# Altium PCB 3_iip_quad_uart.PcbDoc (part 1 of 2)
Units mm, origin at the board's own origin, x right, y up, seen from the top; angles counter-clockwise.
Board outline 82.5 x 28 mm, 2 copper layers (Top Layer, Bottom Layer), stack 1.571 mm thick; 55 components, 29 nets, 180 pads, 29 vias.
Unrouted connection lines stored in the file: 1.
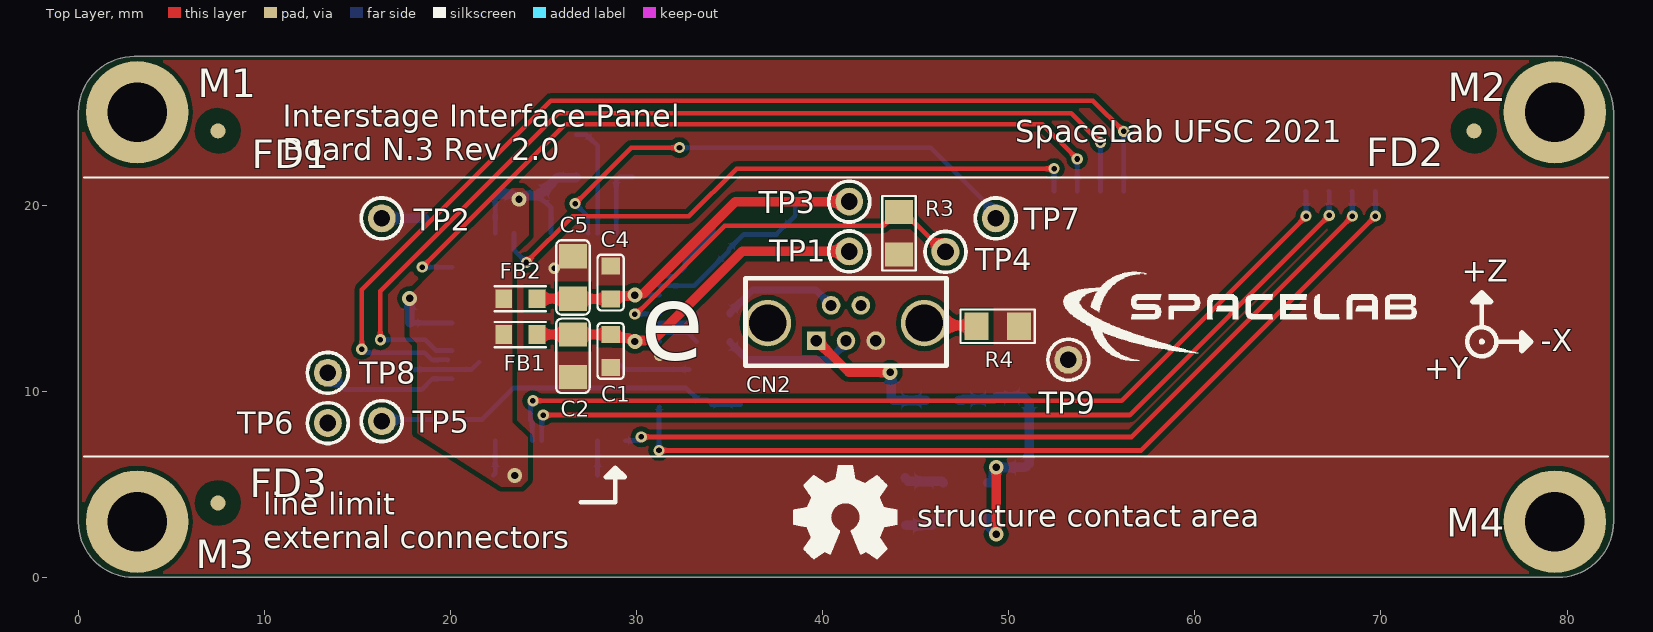
[diagram p0: Top Layer view]
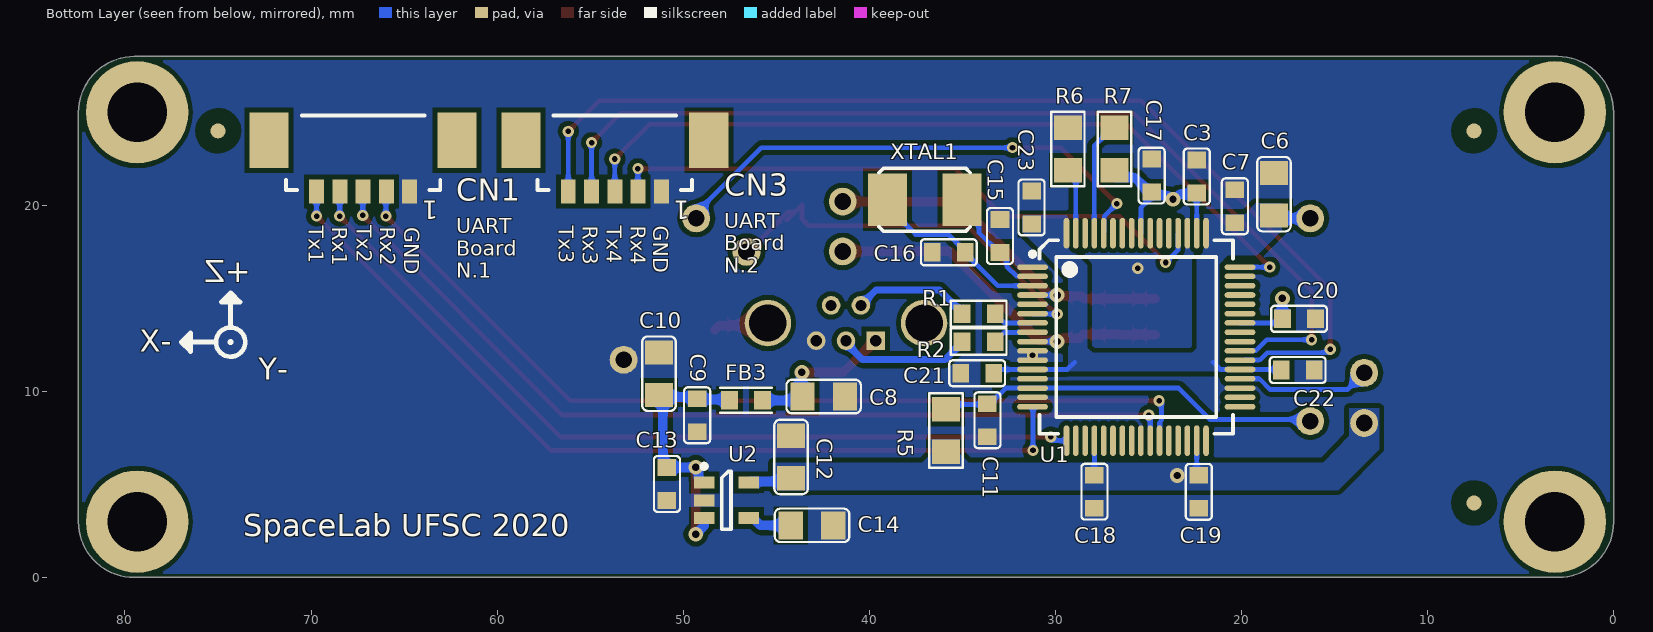
[diagram p1: Bottom Layer view, seen from below]
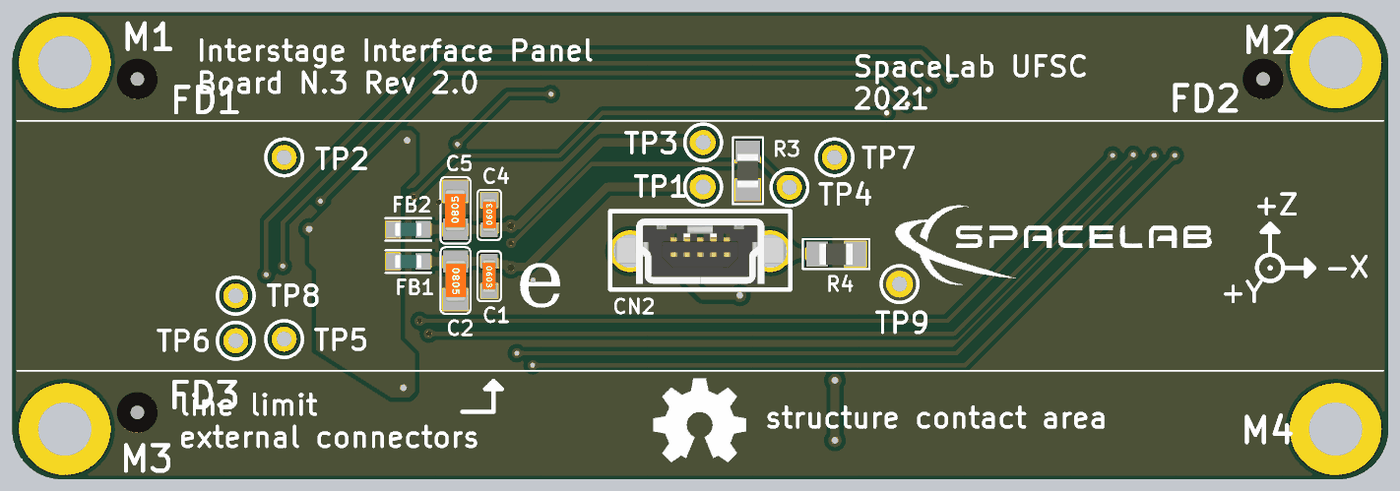
[diagram p2: 3D render of the assembled board from above, using the file's embedded part models]
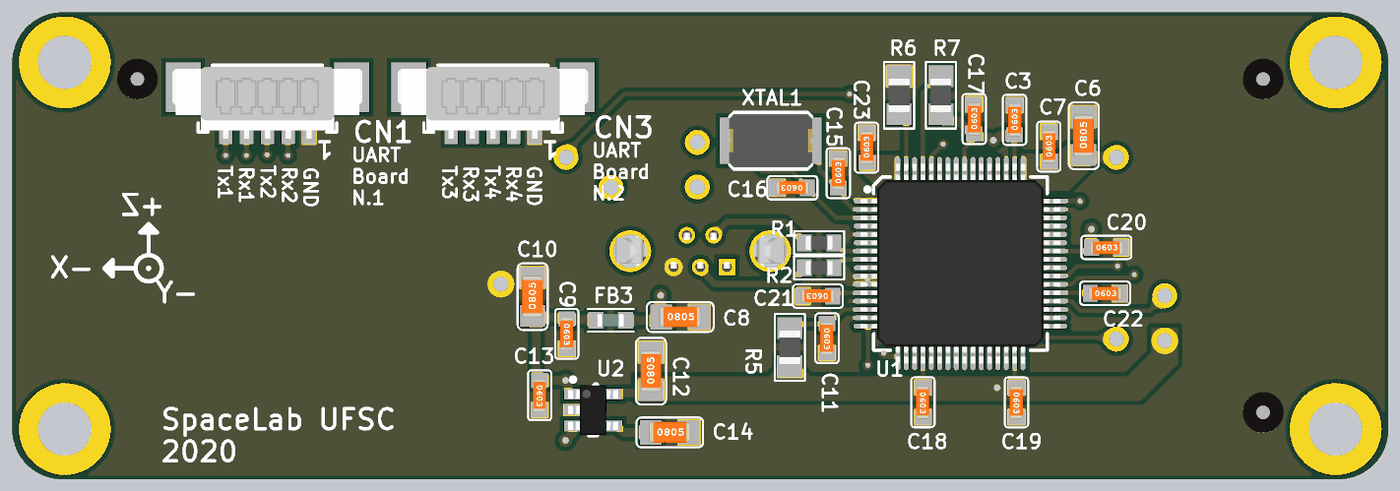
[diagram p3: 3D render of the assembled board from below, using the file's embedded part models]

## Layer stack, top to bottom
Top Solder: solder mask 0.0102, Solder Resist, Dk 3.8
Top Layer: signal copper 0.0356
Dielectric 1: dielectric 1.5, FR-4, Dk 4.5
Bottom Layer: signal copper 0.0356
Bottom Solder: solder mask 0.0102, Solder Resist, Dk 3.8

## Board outline
0,2.962 0,25.005 cw(c2.995,25.005) 2.995,28 79.498,28 cw(c79.498,24.998) 82.5,24.998 82.5,2.985 cw(c79.515,2.985) 79.515,0 2.962,0 cw(c2.962,2.962)

## Design rules (kind name [scope] priority, off if disabled: settings)
BoardOutlineClearance BoardOutlineClearance_JLCPCB [All] p1: gap=0.2 ignorepadtopadclearanceinfootprint=FALSE
BoardOutlineClearance [All] p2: gap=0.254 ignorepadtopadclearanceinfootprint=FALSE except(0: Arc-SplitContinuation Track-SplitContinuation SMDPad-SplitContinuation THPad-SplitContinuation Via-SplitContinuation Fill-SplitContinuation Poly-SplitContinuation Region-SplitContinuation Text-SplitContinuation)
Clearance Clearance_JLCPCB_capabilities [All] p1: gap=0.254 ignorepadtopadclearanceinfootprint=TRUE except(0: Track-Region SMDPad-Region SMDPad-Hole THPad-Region THPad-Hole Via-Hole Fill-Hole Poly-Hole Region-Region Region-Hole Text-Hole; 0.127: Arc-Arc Arc-Track Track-Track SMDPad-SMDPad; 0.15: SMDPad-Text THPad-Text; 0.152: SMDPad-THPad; 0.2: Arc-SMDPad Track-SMDPad; 0.33: Arc-THPad Track-THPad; 0.54: THPad-THPad) // Minimal clearances considering JLCPCB manufacturing
Clearance [All] p2: gap=0.254 ignorepadtopadclearanceinfootprint=FALSE except(0: Arc-Hole Track-Hole SMDPad-Hole THPad-Hole Via-Hole Fill-Hole Poly-Hole Region-Hole Text-Hole) // Default altium designer clearence rule
DiffPairsRouting [All] p1: maxlimit=0.254 minlimit=0.254 mostfreqgap=0.254 toplayer_minwidth=0.254 toplayer_maxwidth=0.381 toplayer_prefwidth=0.381 bottomlayer_minwidth=0.254 bottomlayer_maxwidth=0.381 bottomlayer_prefwidth=0.381 maxuncoupledlength=12.7
HoleSize HoleSize_JLCPCB_capabilities [All] p1: absolutevalues=TRUE maxlimit=6.3 minlimit=0.3 maxpercent=80.000 minpercent=20.000
HoleSize [All] p2: absolutevalues=TRUE maxlimit=2.54 minlimit=0.025 maxpercent=80.000 minpercent=20.000
HoleToHoleClearance HoleToHoleClearance_JLCPCB [All] p1: gap=0.54 allowstackedmicrovias=TRUE
HoleToHoleClearance [All] p2: gap=0.254 allowstackedmicrovias=TRUE
MinimumAnnularRing AnnularRing_JLCPCB_1oz_capabilities [All] p1: minimumring=0.13
MinimumAnnularRing [All] p2: minimumring=0.254
MinimumSolderMaskSliver MinimumSolderMaskSliver_none [All] p1: minsoldermaskwidth=0
MinimumSolderMaskSliver MinimumSolderMaskSliver_JLCPCB [All] p2: minsoldermaskwidth=0.2
MinimumSolderMaskSliver [All] p3: minsoldermaskwidth=0.254
PolygonConnect PolygonConnect_GND [InNet('GND')] p1: connectstyle=Direct reliefconductorwidth=0.254 reliefentries=4 polygonreliefangle="90 Angle" airgapwidth=0.254
PolygonConnect PolygonConnect_Power [(InNet('1.8V') OR InNet('3.3V') OR InNet('5V'))] p2: connectstyle=Direct reliefconductorwidth=0.254 reliefentries=4 polygonreliefangle="90 Angle" airgapwidth=0.254 // Power polygons for power nets (debugger and battery charger)
PolygonConnect [All] p3: connectstyle=Relief reliefconductorwidth=0.254 reliefentries=4 polygonreliefangle="90 Angle" airgapwidth=0.254
RoutingVias RoutingVias_JLCPCB_capabilities [All] p1: holewidth=0.3 width=0.6 viastyle="Through Hole" minholewidth=0.3 minwidth=0.6 maxholewidth=0.711 maxwidth=1.27
RoutingVias [All] p2: holewidth=0.711 width=1.27 viastyle="Through Hole" minholewidth=0.711 minwidth=1.27 maxholewidth=0.711 maxwidth=1.27
SilkToSolderMaskClearance SilkToSolderMaskClearance_none [IsPad] p1: minsilkscreentomaskgap=0 clearancetoexposedcopper=TRUE
SilkToSolderMaskClearance SilkToSolderMaskClearance_JLCPCB [IsPad] p2: minsilkscreentomaskgap=0.15 clearancetoexposedcopper=TRUE
SilkToSolderMaskClearance [IsPad] p3: minsilkscreentomaskgap=0.254 clearancetoexposedcopper=TRUE
SolderMaskExpansion SolderMaskExpansion_JLCPCB [All] p1: expansion=0.05
SolderMaskExpansion [All] p2: expansion=0.102
Width Width_JLCPCB_capabilities [All] p1: maxlimit=0.508 minlimit=0.127 preferedwidth=0.254 minimp=50.000000 maximp=50.000000 favimp=50.000000 // Width considering JLCPCB manufacturing
Width [All] p2: maxlimit=0.254 minlimit=0.254 preferedwidth=0.254
25 further rules are at their usual default settings.

## Classes and differential pairs
component class 0_Architecture: FD1 FD2 FD3 M1 M2 M3 M4
component class 3_iip_quad_uart: C1 C2 C3 C4 C5 C6 C7 C8 C9 C10 C11 C12 C13 C14 C15 C16 C17 C18 C19 C20 C21 C22 C23 CN1 CN2 CN3 FB1 FB2 FB3 R1 R2 R3 R4 R5 R6 R7 TP1 TP2 TP3 TP4 TP5 TP6 U1 U2 XTAL1
differential pair USB_RX: +USB_RX_P -USB_RX_N
differential pair USB_TX: +USB_TX_P -USB_TX_N

## Components (designator, comment, footprint, x,y, rotation, side; value= is the part's Value field where it differs from the comment)
C1 "0.1 uF, 0603 (1608 metric)" C0603_MD 28.6,12.175 r270 top
C2 "4.7 uF, 0802 (2012 metric)" C0805_MD 26.575,11.913 r270 top
C3 "0.1 uF, 0603 (1608 metric)" C0603_MD 22.4,21.55 r90 bottom
C4 "0.1 uF, 0603 (1608 metric)" C0603_MD 28.6,15.85 r90 top
C5 "4.7 uF, 0802 (2012 metric)" C0805_MD 26.575,16.124 r90 top
C6 "4.7 uF, 0802 (2012 metric)" C0805_MD 18.25,20.6 r90 bottom
C7 "0.1 uF, 0603 (1608 metric)" C0603_MD 20.35,19.95 r90 bottom
C8 "10000 pF, 0805 (2012 metric)" C0805_MD 42.45,9.725 r180 bottom
C9 "0.1 uF, 0603 (1608 metric)" C0603_MD 49.25,8.718 r270 bottom
C10 "4.7 uF, 0802 (2012 metric)" C0805_MD 51.3,10.95 r90 bottom
C11 "0.1 uF, 0603 (1608 metric)" C0603_MD 33.65,8.45 r270 bottom
C12 "4.7 uF, 0802 (2012 metric)" C0805_MD 44.2,6.475 r90 bottom
C13 "0.1 uF, 0603 (1608 metric)" C0603_MD 50.875,5.025 r270 bottom
C14 "10000 pF, 0805 (2012 metric)" C0805_MD 43.075,2.8 r180 bottom
C15 "12 pF, 0603 (1608 metric)" C0603_MD 32.975,18.35 r90 bottom
C16 "12 pF, 0603 (1608 metric)" C0603_MD 35.725,17.475 r0 bottom
C17 "0.1 uF, 0603 (1608 metric)" C0603_MD 24.825,21.6 r90 bottom
C18 "0.1 uF, 0603 (1608 metric)" C0603_MD 27.9,4.609 r270 bottom
C19 "0.1 uF, 0603 (1608 metric)" C0603_MD 22.289,4.605 r270 bottom
C20 "0.1 uF, 0603 (1608 metric)" C0603_MD 16.9,13.9 r180 bottom
C21 "0.1 uF, 0603 (1608 metric)" C0603_MD 34.2,10.975 r0 bottom
C22 "0.1 uF, 0603 (1608 metric)" C0603_MD 16.975,11.15 r180 bottom
C23 "0.1 uF, 0603 (1608 metric)" C0603_MD 31.275,19.886 r90 bottom
CN1 "5 pin PicoBlade" "PICO BLADE 0533980571" 67.2,22.125 r0 bottom
CN2 "Vertical mini B USB 2.0 port" "MINI USB B 180GRAUS WE" 41.25,13.675 r0 top
CN3 "5 pin PicoBlade" "PICO BLADE 0533980571" 53.675,22.125 r0 bottom
FB1 "Ferrite Bead 47 Ohms 500mA 100MHz" L0603 23.75,13.056 r0 top
FB2 "Ferrite Bead 47 Ohms 500mA 100MHz" L0603 23.75,14.981 r0 top
FB3 "Ferrite Bead 47 Ohms 500mA 100MHz" L0603 46.625,9.525 r0 bottom
FD1 "Fiducial 1.3" "FIDUCIAL 1.3MM" 7.5,24 r0 top
FD2 "Fiducial 1.3" "FIDUCIAL 1.3MM" 75,24 r0 top
FD3 "Fiducial 1.3" "FIDUCIAL 1.3MM" 7.5,4 r0 top
M1 "IB Mechanical Hole" "M3 hole (5.5mm pad)"#1 3,25 r0 top
M2 "IB Mechanical Hole" "M3 hole (5.5mm pad)"#1 3,3 r0 top
M3 "IB Mechanical Hole" "M3 hole (5.5mm pad)"#2 79.4,24.9 r0 top
M4 "IB Mechanical Hole" "M3 hole (5.5mm pad)"#3 79.4,3 r0 top
R1 "RES 10 ohms (0603)" R0603_MD 34.121,14.175 r180 bottom
R2 "RES 10 ohms (0603)" R0603_MD 34.121,12.675 r180 bottom
R3 "RES 12K ohms (0805)" R0805_MD 44.1,18.5 r90 top
R4 "DNP" R0805_MD 49.4,13.5 r0 top
R5 "10k ohms, 0805 (2012 metric)" R0805_MD 35.875,7.9 r90 bottom value=10k
R6 "10k ohms, 0805 (2012 metric)" R0805_MD 29.325,23.025 r270 bottom value=10k
R7 "10k ohms, 0805 (2012 metric)" R0805_MD 26.825,23.025 r90 bottom value=10k
TP1 "DNP" "TEST POINT PTH" 41.425,17.525 r0 top
TP2 "DNP" "TEST POINT PTH" 16.3,19.3 r0 top
TP3 "DNP" "TEST POINT PTH" 41.425,20.2 r0 top
TP4 "DNP" "TEST POINT PTH" 46.6,17.5 r0 top
TP5 "DNP" "TEST POINT PTH" 16.3,8.4 r0 top
TP6 "DNP" "TEST POINT PTH" 13.4,8.3 r0 top
TP7 "DNP" "TEST POINT PTH" 49.3,19.3 r90 top
TP8 "DNP" "TEST POINT PTH" 13.4,11 r90 top
TP9 "DNP" "TEST POINT PTH" 53.2,11.7 r90 top
U1 "FT4232HL-REEL" LQFP-64 25.65,12.929 r180 bottom
U2 "TPS79333DBVR" SOT23-5 47.675,4.147 r180 bottom
XTAL1 "12.000MHz 12pF" "TXC 7A SERIES" 37.025,20.3 r0 bottom

## Footprints (in the part's own frame and the unit in brackets; to place one, negate y for a bottom-side part, rotate by r counter-clockwise, add the part's x,y. Pads: shape width x height; smd on the part's side, far side on the other; paste and mask are expansions set on the pad)
C0603_MD [mm] "Chip Capacitor, Body 1.6x0.8mm, IPC Medium Density"
  rect 0.9x1 smd: 1(-0.889,0) 2(0.889,0)
  silkscreen extent -1.5,-0.7 1.5,0.7, body extent -1,-0.41 1,0.38, height 0.79
C0805_MD [mm] "Chip Capacitor, Body 2.0x1.3mm, IPC Medium Density"
  rect 1.3x1.5 smd: 1(-1.143,0) 2(1.143,0)
  silkscreen extent -2,-0.9 2,0.9, body extent -1.25,-0.61 1.25,0.64, height 0.79
"FIDUCIAL 1.3MM" [mil]
  round 32 smd far side: ""(0,0)
  round 32 on Bottom Solder: ""(0,0)
  round 32 smd: ""(0,0)
  Top Layer pour cut-out: -48.23,-6.89 -45.31,17.58 -30.69,37.43 -8.18,47.47 16.35,45.09 36.52,30.91 47.05,8.63 45.22,-15.95 31.5,-36.42 31.5,-36.42 8.41,-46.85 -16.81,-44.45 -37.51,-29.85 -48.23,-6.89
  Bottom Layer pour cut-out: -48.23,-6.89 -45.31,17.58 -30.69,37.43 -8.18,47.47 16.35,45.09 36.52,30.91 47.05,8.63 45.22,-15.95 31.5,-36.42 31.5,-36.42 8.41,-46.85 -16.81,-44.45 -37.51,-29.85 -48.23,-6.89
L0603 [mm]
  rect 0.9x1 smd: 1(-0.889,0) 2(0.889,0)
  silkscreen extent -1.38,-0.67 1.38,0.67, body extent -0.8,-0.4 0.8,0.4, height 0.95
LQFP-64 [mm] "64-Pin LQFP 0.5 mm Pitch"
  oval 1.65x0.3 smd: 1(-5.575,3.75) 2(-5.575,3.25) 3(-5.575,2.75) 4(-5.575,2.25) 5(-5.575,1.75) 6(-5.575,1.25) 7(-5.575,0.75) 8(-5.575,0.25) 9(-5.575,-0.25) 10(-5.575,-0.75) 11(-5.575,-1.25) 12(-5.575,-1.75) 13(-5.575,-2.25) 14(-5.575,-2.75) 15(-5.575,-3.25) 16(-5.575,-3.75) 33(5.575,-3.75) 34(5.575,-3.25) 35(5.575,-2.75) 36(5.575,-2.25) 37(5.575,-1.75) 38(5.575,-1.25) 39(5.575,-0.75) 40(5.575,-0.25) 41(5.575,0.25) 42(5.575,0.75) 43(5.575,1.25) 44(5.575,1.75) 45(5.575,2.25) 46(5.575,2.75) 47(5.575,3.25) 48(5.575,3.75)
  oval 0.3x1.65 smd: 17(-3.75,-5.575) 18(-3.25,-5.575) 19(-2.75,-5.575) 20(-2.25,-5.575) 21(-1.75,-5.575) 22(-1.25,-5.575) 23(-0.75,-5.575) 24(-0.25,-5.575) 25(0.25,-5.575) 26(0.75,-5.575) 27(1.25,-5.575) 28(1.75,-5.575) 29(2.25,-5.575) 30(2.75,-5.575) 31(3.25,-5.575) 32(3.75,-5.575) 49(3.75,5.575) 50(3.25,5.575) 51(2.75,5.575) 52(2.25,5.575) 53(1.75,5.575) 54(1.25,5.575) 55(0.75,5.575) 56(0.25,5.575) 57(-0.25,5.575) 58(-0.75,5.575) 59(-1.25,5.575) 60(-1.75,5.575) 61(-2.25,5.575) 62(-2.75,5.575) 63(-3.25,5.575) 64(-3.75,5.575)
  silkscreen extent -5.7,-5.2 5.2,5.2, body extent -6,-6 6,6, height 1.6
"M3 hole (5.5mm pad)"#1 [mm]
  round 5.5 hole 3.2: 0(0.15,0)
"M3 hole (5.5mm pad)"#2 [mm]
  round 5.5 hole 3.2: 0(-0.05,0.1)
"M3 hole (5.5mm pad)"#3 [mm]
  round 5.5 hole 3.2: 0(-0.05,0)
"MINI USB B 180GRAUS WE" [mm]
  round 2.5 hole 2: 0(-4.2,0) 0(4.2,0)
  rect 1x1 hole 0.6: 1(-1.6,-0.95)
  round 1 hole 0.6: 2(-0.8,0.95) 3(0,-0.95) 4(0.8,0.95) 5(1.6,-0.95)
  silkscreen extent -5.4,-2.3 5.4,2.4, body extent -5.1,-1.95 5.1,1.95, height 9.21
"PICO BLADE 0533980571" [mm]
  rect 2.1x3 smd: 0(-5.05,-1.375) 0(5.05,-1.375)
  rect 0.8x1.3 smd: 1(-2.5,1.375) 2(-1.25,1.375) 3(0,1.375) 4(1.25,1.375) 5(2.5,1.375)
  silkscreen extent -4.15,-2.7 4.15,1.3, body extent -5.7,-2.6 5.7,1.7, height 5.87
R0603_MD [mm] "Chip Resistor, Body 1.6x0.8mm, IPC Medium Density"
  rect 0.9x1 smd: 1(-0.889,0) 2(0.889,0)
  silkscreen extent -1.5,-0.7 1.5,0.7, body extent -0.8,-0.4 0.8,0.4, height 0.37
R0805_MD [mm] "Chip Resistor, Body 2.0x1.3mm, IPC Medium Density"
  rect 1.3x1.5 smd: 1(-1.143,0) 2(1.143,0)
  silkscreen extent -2,-0.9 2,0.9, body extent -1,-0.63 1,0.63, height 0.47
SOT23-5 [mm]
  rect 1.1x0.65 smd: 1(-1.2,0.95) 2(-1.2,0) 3(-1.2,-0.95) 4(1.2,-0.95) 5(1.2,0.95)
  silkscreen extent -1.32,-1.55 0.25,1.95, body extent -1.5,-1.5 1.5,1.5, height 1.3
"TEST POINT PTH" [mm]
  round 1.5 hole 0.9: 1(0,0)
  silkscreen extent -1.1,-1.1 1.1,1.1
"TXC 7A SERIES" [mm]
  rect 2.1x2.8 smd: 1(-2,0) 2(2,0)
  silkscreen extent -2.45,-1.7 2.45,1.7, body extent -2.5,-1.6 2.5,1.6, height 1.35

## Part data
C1 C3 C4 C7 C9 C11 C13 C17 C18 C19 C20 C21 C22 C23: library part C1608X7R1H104K080AA, "TDK - C1608X7R1H104K080AA - SMD Multilayer Ceramic Capacitor, 0.1 µF, 50 V, 0603 [1608 Metric], ± 10%, X7R, C Series", Capacitance=100nF, Case/Package=0603, Case Code (Metric)=1608, Dielectric=X7R, Dielectric Material=Ceramic, Manufacturer=TDK, Max Operating Temperature=125°C, Min Operating Temperature=-55°C, Package Quantity=1, Supplier Part Number 1=445-1314-1-ND, Tolerance=10%, Voltage=50V, Case Code (Imperial)=0603, ComponentLink1Description=https://product.tdk.com/info/en/catalog/spec/mlccspec_commercial_general_midvoltage_en.pdf?src-supplier=Digi-Key, ComponentLink1URL=https://product.tdk.com/info/en/catalog/spec/mlccspec_commercial_general_midvoltage_en.pdf?src-supplier=Digi-Key, ComponentLink2Description=http://uk.rs-online.com/webdocs/13d1/0900766b813d1103.pdf?src-supplier=RSComponents, ComponentLink2URL=http://uk.rs-online.com/webdocs/13d1/0900766b813d1103.pdf?src-supplier=RSComponents, ComponentLink3Description=http://www.tdk.co.jp/tefe02/e412_c.pdf?src-supplier=Avnet+Europe, ComponentLink3URL=http://www.tdk.co.jp/tefe02/e412_c.pdf?src-supplier=Avnet+Europe, ComponentLink4Description=http://www.farnell.com/datasheets/2792994.pdf?src-supplier=Farnell, ComponentLink4URL=http://www.farnell.com/datasheets/2792994.pdf?src-supplier=Farnell, ComponentLink5Description=http://www.farnell.com/datasheets/1744655.pdf?src-supplier=Element14, ComponentLink5URL=http://www.farnell.com/datasheets/1744655.pdf?src-supplier=Element14, Composition=Ceramic, Depth=0.8mm, Height=0.8mm, Lead Free="Lead Free", Length=1.6mm, Manufacturer Part Number=C1608X7R1H104K080AA, Mount="Surface Mount", Number of Pins=2, Packaging="Tape and Reel", Pricing 1="1=0.12, 10=0.088, 100=0.0413, 500=0.02896, 1000=0.02397 (USD)", Pricing 2="1=0.12, 10=0.088, 100=0.041, 500=0.029, 1000=0.024, 4000=0.017, 8000=0.016, 24000=0.013, 48000=0.011 (USD)", Radiation Hardening=No, REACH SVHC="No SVHC", Stock 1=513759, Stock 2=34512, Supplier 1=Digi-Key, Supplier 2=Mouser, Supplier Part Number 2=810-C1608X7R1H104K, Termination=SMD/SMT, Thickness=0.037inch, Voltage Rating=50V, Voltage Rating (DC)=50V, Weight=7.1E-05oz, Width=0.8mm
C2 C5 C6 C10 C12: library part C2012X7R1E475K125AB, "Ceramic Capacitor SMD Multilayer, 0805 [2012 Metric], 4.7 uF, 25 V,  10%, X7R, C Series", Capacitance=4.7uF, Case/Package=0805, Case Code (Metric)=2012, Dielectric=X7R, Dielectric Material=Ceramic, Manufacturer=TDK, Max Operating Temperature=125°C, Min Operating Temperature=-55°C, Package Quantity=2000, Supplier Part Number 1=445-5972-1-ND, Tolerance=10%, Voltage=25V, Case Code (Imperial)=0805, ComponentLink1Description=http://www.mouser.com/ds/2/400/lcc_commercial_general_en-837201.pdf?src-supplier=Mouser, ComponentLink1URL=http://www.mouser.com/ds/2/400/lcc_commercial_general_en-837201.pdf?src-supplier=Mouser, ComponentLink2Description=https://product.tdk.com/info/en/catalog/spec/mlccspec_commercial_general_midvoltage_en.pdf?src-supplier=Digi-Key, ComponentLink2URL=https://product.tdk.com/info/en/catalog/spec/mlccspec_commercial_general_midvoltage_en.pdf?src-supplier=Digi-Key, ComponentLink3Description=http://www.farnell.com/datasheets/1796654.pdf?src-supplier=Newark, ComponentLink3URL=http://www.farnell.com/datasheets/1796654.pdf?src-supplier=Newark, ComponentLink4Description=http://www.tdk.co.jp/tefe02/e412_c.pdf?src-supplier=Avnet+Europe, ComponentLink4URL=http://www.tdk.co.jp/tefe02/e412_c.pdf?src-supplier=Avnet+Europe, Composition=Ceramic, Depth=1.25mm, Height=1.25mm, Lead Free="Lead Free", Length=2mm, Manufacturer Part Number=C2012X7R1E475K125AB, Mount="Surface Mount", Packaging="Tape and Reel", Pricing 1="1=0.48, 10=0.339, 100=0.223, 500=0.16518, 1000=0.1404 (USD)", Pricing 2="1=0.54, 10=0.382, 100=0.251, 500=0.186, 1000=0.158, 2000=0.121 (USD)", Radiation Hardening=No, REACH SVHC="No SVHC", Stock 1=196988, Stock 2=141636, Supplier 1=Digi-Key, Supplier 2=Mouser, Supplier Part Number 2=810-C2012X7R1E475K, Termination=SMD/SMT, Thickness=0.057inch, Voltage Rating=25V, Voltage Rating (DC)=25V, Weight=0.000194oz, Width=0.049inch
C8 C14: library part 08055C103KAT4A, "AVX - 08055C103KAT4A - SMD Multilayer Ceramic Capacitor, 10000 pF, 50 V, 0805 [2012 Metric], &#177; 10%, X7R", Capacitance=10nF, Case/Package=0805, Case Code (Metric)=2012, Dielectric=X7R, Manufacturer="Kyocera AVX", Max Operating Temperature=125°C, Min Operating Temperature=-55°C, Supplier Part Number 1=478-10687-1-ND, Tolerance=10%, Voltage=50V, Case Code (Imperial)=0805, ComponentLink1Description=http://www.mouser.com/ds/2/40/X7RDielectric-777024.pdf?src-supplier=Mouser, ComponentLink1URL=http://www.mouser.com/ds/2/40/X7RDielectric-777024.pdf?src-supplier=Mouser, ComponentLink2Description=http://www.avx.com/docs/Catalogs/cx7r.pdf?src-supplier=Future+Electronics, ComponentLink2URL=http://www.avx.com/docs/Catalogs/cx7r.pdf?src-supplier=Future+Electronics, Depth=1.25mm, Height=0.94mm, Lead Free="Lead Free", Length=2.01mm, Manufacturer Part Number=08055C103KAT4A, Mount="Surface Mount", Number of Pins=2, Packaging="Tape and Reel", Pricing 1="1=0.13, 10=0.094, 100=0.044, 500=0.03086, 1000=0.02555, 2500=0.02378, 5000=0.02176 (USD)", Pricing 2="1=0.12, 10=0.085, 100=0.04, 500=0.028, 1000=0.023, 2500=0.018 (USD)", Radiation Hardening=No, Stock 1=515489, Stock 2=88428, Supplier 1=Digi-Key, Supplier 2=Mouser, Supplier Part Number 2=581-08055C103KAT4A, Termination=SMD/SMT, Voltage Rating=50V, Voltage Rating (DC)=50V, Weight=0.000194oz, Width=1.25mm
C15 C16: library part CL10C120JB8NNNC, "Cap Ceramic 12pF 50VDC C0G 5% SMD 0603 Paper T/R", Capacitance=12pF, Case/Package=0603, Case Code (Metric)=1608, Dielectric=C0G, Manufacturer=Samsung, Max Operating Temperature=125°C, Min Operating Temperature=-55°C, Package Quantity=1, Supplier Part Number 1=1276-1254-1-ND, Temperature Coefficient=300ppm/°C, Tolerance=5%, Voltage=50V, Case Code (Imperial)=0603, ComponentLink1Description=https://media.digikey.com/pdf/Data%20Sheets/Samsung%20PDFs/CL_Series_MLCC_ds.pdf?src-supplier=Digi-Key, ComponentLink1URL=https://media.digikey.com/pdf/Data%20Sheets/Samsung%20PDFs/CL_Series_MLCC_ds.pdf?src-supplier=Digi-Key, ComponentLink2Description=https://www.verical.com/server-webapp/html/getDatasheet?partID=640658&src-supplier=Verical, ComponentLink2URL=https://www.verical.com/server-webapp/html/getDatasheet?partID=640658&src-supplier=Verical, ComponentLink3Description=https://produktinfo.conrad.com/datenblaetter/450000-474999/457317-da-01-en-VS_KONDENSATOR_0603.pdf?src-supplier=Conrad, ComponentLink3URL=https://produktinfo.conrad.com/datenblaetter/450000-474999/457317-da-01-en-VS_KONDENSATOR_0603.pdf?src-supplier=Conrad, Contact Plating=Tin, Depth=0.8mm, Height=0.8mm, Lead Free="Lead Free", Length=1.6mm, Manufacturer Part Number=CL10C120JB8NNNC, Material=Ceramic, Mount="Surface Mount", Packaging="Tape and Reel", Pricing 1="1=0.1, 10=0.045, 100=0.0201, 500=0.01436, 1000=0.01128 (USD)", Radiation Hardening=No, Stock 1=64675, Supplier 1=Digi-Key, Thickness=0.035inch, Voltage Rating=50V, Voltage Rating (DC)=50V, Width=0.031inch
CN1 CN3: library part 53398-0571, "Wire-To-Board Connector, Vertical, PicoBlade 53398 Series, Surface Mount, Header, 5, 1.25 mm", Color=Natural, Contact Resistance=20mR, Current Rating=1A, Flammability Rating="UL94 V-0", Insulation Resistance=100MR, Manufacturer=Molex, Max Operating Temperature=85°C, Max Voltage Rating (AC)=125V, Min Operating Temperature=-40°C, Package Quantity=1000, Supplier Part Number 1=WM7609CT-ND, Body Plating=Tin, ComponentLink1Description=http://www.molex.com/webdocs/datasheets/pdf/en-us/0533980571_PCB_HEADERS.pdf?src-supplier=Avnet+Europe, ComponentLink1URL=http://www.molex.com/webdocs/datasheets/pdf/en-us/0533980571_PCB_HEADERS.pdf?src-supplier=Avnet+Europe, ComponentLink2Description=http://www.farnell.com/datasheets/2697810.pdf?src-supplier=Newark, ComponentLink2URL=http://www.farnell.com/datasheets/2697810.pdf?src-supplier=Newark, ComponentLink3Description=https://www.distrelec.biz/Web/Downloads/46/_e/gf116833-116846_e.pdf?mime=application%2Fpdf&src-supplier=Distrelec, ComponentLink3URL=https://www.distrelec.biz/Web/Downloads/46/_e/gf116833-116846_e.pdf?mime=application%2Fpdf&src-supplier=Distrelec, ComponentLink4Description=http://www.farnell.com/datasheets/1632115.pdf?src-supplier=Element14, ComponentLink4URL=http://www.farnell.com/datasheets/1632115.pdf?src-supplier=Element14, ComponentLink5Description=http://uk.rs-online.com/webdocs/078f/0900766b8078fc92.pdf?src-supplier=RSComponents, ComponentLink5URL=http://uk.rs-online.com/webdocs/078f/0900766b8078fc92.pdf?src-supplier=RSComponents, ComponentLink6Description=http://www.farnell.com/datasheets/1867377.pdf?src-supplier=Element14, ComponentLink6URL=http://www.farnell.com/datasheets/1867377.pdf?src-supplier=Element14, ComponentLink7Description=http://www.farnell.com/datasheets/1626108.pdf?src-supplier=Element14, ComponentLink7URL=http://www.farnell.com/datasheets/1626108.pdf?src-supplier=Element14, ComponentLink8Description=http://www.mouser.com/ds/2/276/0533980571_PCB_HEADERS-146486.pdf?src-supplier=Mouser, ComponentLink8URL=http://www.mouser.com/ds/2/276/0533980571_PCB_HEADERS-146486.pdf?src-supplier=Mouser, Contact Gender=Male, Contact Material=Bronze,Tin,Brass, Contact Plating=Tin, Gender=Male, Glow Wire Compliant=Non-compliant, Housing Color=Natural, Housing Material=Nylon, Lead Free="Lead Free", Lead Pitch=1.25mm, Manufacturer Part Number=53398-0571, Mount="Surface Mount", Number of Circuits=5, Number of Contacts=5, Number of Positions=5, Number of Rows=1, Orientation=Vertical, Packaging="Tape and Reel", Pitch=1.25mm, Pricing 1="1=1.32, 10=1.159, 100=0.9999, 500=0.81814 (USD)", Pricing 2="1=1.32, 10=1.15, 100=0.999, 500=0.818, 1000=0.389, 2000=0.342 (USD)", Radiation Hardening=No, REACH SVHC=Unknown, Stock 1=427, Stock 2=35606, Supplier 1=Digi-Key, Supplier 2=Mouser, Supplier Part Number 2=538-53398-0571, Termination=Solder, Voltage Rating=125V, Voltage Rating (AC)=125V, Voltage Rating (DC)=125V, Working Voltage=125V
CN2: library part 651005136421, "WURTH ELEKTRONIK - 651005136421 - Conector USB, Mini USB Tipo B, USB 2.0, Receptáculo, 5 Vías, Montaje de Agujero Pasante, Vertical", Color=Black, Current Rating=1A, Insulation Resistance=1GR, Manufacturer="Wurth Electronics", Max Operating Temperature=105°C, Min Operating Temperature=-40°C, Package Quantity=100, Supplier Part Number 1=732-2735-ND, Voltage Rating=30V, ComponentLink1Description=http://katalog.we-online.de/kataloge/eican/media/pdf/651005136421.pdf?src-supplier=Mouser, ComponentLink1URL=http://katalog.we-online.de/kataloge/eican/media/pdf/651005136421.pdf?src-supplier=Mouser, ComponentLink2Description=http://documents.rs-components.com/techlib://itc_doclist_GB.htm?stockno=7480872&src-supplier=RSComponents, ComponentLink2URL=http://documents.rs-components.com/techlib://itc_doclist_GB.htm?stockno=7480872&src-supplier=RSComponents, ComponentLink3Description=http://www.farnell.com/datasheets/1644185.pdf?src-supplier=Element14, ComponentLink3URL=http://www.farnell.com/datasheets/1644185.pdf?src-supplier=Element14, ComponentLink4Description=http://www.produktinfo.conrad.com/datenblaetter/1000000-1099999/001088420-da-01-en-WR_COM_MINI_USB_TYP_B_651005136421.pdf?src-supplier=Conrad, ComponentLink4URL=http://www.produktinfo.conrad.com/datenblaetter/1000000-1099999/001088420-da-01-en-WR_COM_MINI_USB_TYP_B_651005136421.pdf?src-supplier=Conrad, Connector Type=USB,Socket, Contact Material="Copper Alloy", Contact Plating=Gold, Features=Shielded, Gender=Receptacle, Lead Free="Lead Free", Length=7.7mm, Manufacturer Part Number=651005136421, Mount="Through Hole,Vertical", Number of Contacts=5, Number of Ports=1, Number of Positions=5, Orientation=Vertical, Packaging=Tray, Pricing 1="1=2.97, 10=2.621, 50=2.47, 100=2.218, 500=2.016 (USD)", Pricing 2="1=2.97, 10=2.63, 25=2.63, 50=2.47, 100=2.22, 250=2.22 (USD)", REACH SVHC=Unknown, Stock 1=2667, Stock 2=2133, Supplier 1=Digi-Key, Supplier 2=Mouser, Supplier Part Number 2=710-651005136421, Termination=Solder, USB Standard="USB 2.0", Width=12mm
FB1 FB2 FB3: library part 742792608, "WURTH ELEKTRONIK   742792608   FERRITE BEAD, 0.1 OHM, 0.5A, 0603", Case/Package=SMD/SMT, Case Code (Imperial)=0603, Case Code (Metric)=1608, Current Rating=500mA, DC Resistance (DCR)=100mR, Inductance=1H, Manufacturer="Wurth Electronics", Max Operating Temperature=125°C, Min Operating Temperature=-55°C, Package Quantity=1, Supplier Part Number 1=732-1596-1-ND, Test Frequency=100MHz, Tolerance=25%, ComponentLink1Description=http://katalog.we-online.de/pbs/datasheet/742792608.pdf?src-supplier=Digi-Key, ComponentLink1URL=http://katalog.we-online.de/pbs/datasheet/742792608.pdf?src-supplier=Digi-Key, ComponentLink2Description=http://www.farnell.com/datasheets/2290671.pdf?src-supplier=Farnell, ComponentLink2URL=http://www.farnell.com/datasheets/2290671.pdf?src-supplier=Farnell, ComponentLink3Description=http://documents.rs-components.com/techlib://itc_doclist_GB.htm?stockno=6693986&src-supplier=RSComponents, ComponentLink3URL=http://documents.rs-components.com/techlib://itc_doclist_GB.htm?stockno=6693986&src-supplier=RSComponents, ComponentLink4Description=http://www.farnell.com/datasheets/1696033.pdf?src-supplier=Element14, ComponentLink4URL=http://www.farnell.com/datasheets/1696033.pdf?src-supplier=Element14, ComponentLink5Description=http://www.mouser.com/ds/2/445/742792608-538481.pdf?src-supplier=Mouser, ComponentLink5URL=http://www.mouser.com/ds/2/445/742792608-538481.pdf?src-supplier=Mouser, ComponentLink6Description=http://www.farnell.com/datasheets/2290671.pdf?src-supplier=Newark, ComponentLink6URL=http://www.farnell.com/datasheets/2290671.pdf?src-supplier=Newark, Core Material=Ferrite, Depth=0.8mm, Height=0.8mm, Impedance=47R, Lead Free="Lead Free", Length=1.6mm, Manufacturer Part Number=742792608, Material=Ferrite, Max Current Rating=500mA, Max DC Current=500mA, Mount="Surface Mount", Number of Lines=1, Packaging="Tape and Reel", Pricing 1="1=0.17, 50=0.168, 100=0.155, 500=0.148, 1000=0.141, 2000=0.134 (USD)", Pricing 2="1=0.18, 10=0.172, 25=0.172, 50=0.168, 100=0.155, 250=0.155 (USD)", REACH SVHC=Unknown, Resistance=100mR, Stock 1=969, Stock 2=6414, Supplier 1=Digi-Key, Supplier 2=Mouser, Supplier Part Number 2=710-742792608, Termination=SMD/SMT, Weight=0.000141oz, Width=0.8mm
FD1 FD2 FD3: "Fiducial 1.3mm"
M1 M2 M3 M4: "Mechanical Hole for FloripaSat-2 interface boards"
R1 R2: library part RC0603FR-0710RL, "YAGEO (PHYCOMP) - RC0603FR-0710RL - RES, THICK FILM, 10R, 1%, 0.1W, 0603", Case/Package=0603, Case Code (Metric)=1608, Manufacturer=Yageo, Max Operating Temperature=155°C, Min Operating Temperature=-55°C, Power Rating=100mW, Resistance=10R, Supplier Part Number 1=311-10.0HRCT-ND, Temperature Coefficient=200ppm/°C, Tolerance=1%, Voltage Rating=50V, Case Code (Imperial)=0603, ComponentLink1Description=http://www.farnell.com/datasheets/1868787.pdf?src-supplier=Element14, ComponentLink1URL=http://www.farnell.com/datasheets/1868787.pdf?src-supplier=Element14, ComponentLink2Description=http://www.yageo.com/documents/recent/PYu-RC0603_51_RoHS_L_4.pdf?src-supplier=Avnet, ComponentLink2URL=http://www.yageo.com/documents/recent/PYu-RC0603_51_RoHS_L_4.pdf?src-supplier=Avnet, ComponentLink3Description=http://documents.rs-components.com/techlib://itc_doclist_GB.htm?stockno=5048984&src-supplier=RSComponents, ComponentLink3URL=http://documents.rs-components.com/techlib://itc_doclist_GB.htm?stockno=5048984&src-supplier=RSComponents, ComponentLink4Description=http://www.yageo.com/documents/recent/PYu-RC0603_51_RoHS_L_4.pdf?src-supplier=Avnet+Europe, ComponentLink4URL=http://www.yageo.com/documents/recent/PYu-RC0603_51_RoHS_L_4.pdf?src-supplier=Avnet+Europe, Composition="Thick Film", Contact Plating=Tin,Matte, Depth=0.8mm, Height=0.45mm, Lead Free="Lead Free", Length=1.6mm, Manufacturer Part Number=RC0603FR-0710RL, Military Standard=Not, Number of Pins=2, Packaging="Tape and Reel", Pricing 1="1=0.1, 10=0.046, 100=0.0187, 1000=0.0084, 2500=0.00729 (USD)", Pricing 2="1=0.15, 10=0.036, 100=0.012, 1000=0.009, 5000=0.006, 10000=0.006 (USD)", Radiation Hardening=No, REACH SVHC="No SVHC", Stock 1=9251104, Stock 2=267888, Supplier 1=Digi-Key, Supplier 2=Mouser, Supplier Part Number 2=603-RC0603FR-0710RL, Termination=SMD/SMT, Voltage Rating (DC)=50V, Width=0.8mm
R3: library part RMCF0805FT12K0, "Resistor, SMT, 0805, 12K Ohm, +/-1%, +/-100ppm, Thk Film, T/R Marked", Case/Package=0805, Case Code (Metric)=2012, Manufacturer="Stackpole Electronics", Max Operating Temperature=155°C, Max Power Dissipation=125mW, Min Operating Temperature=-55°C, Resistance=12kR, Supplier Part Number 1=RMCF0805FT12K0CT-ND, Temperature Coefficient=100ppm/°C, Tolerance=1%, Case Code (Imperial)=0805, ComponentLink1Description=https://www.seielect.com/catalog/SEI-RMCF_RMCP.pdf?src-supplier=Avnet, ComponentLink1URL=https://www.seielect.com/catalog/SEI-RMCF_RMCP.pdf?src-supplier=Avnet, ComponentLink2Description=https://www.seielect.com/Catalog/SEI-RMCF_RMCP.pdf?src-supplier=Digi-Key, ComponentLink2URL=https://www.seielect.com/Catalog/SEI-RMCF_RMCP.pdf?src-supplier=Digi-Key, ComponentLink3Description=https://www.seielect.com/catalog/SEI-Packaging.pdf?src-supplier=Digi-Key, ComponentLink3URL=https://www.seielect.com/catalog/SEI-Packaging.pdf?src-supplier=Digi-Key, ComponentLink4Description=http://seielect.com/Catalog/SEI-RMCF_RMCP.pdf?src-supplier=Future+Electronics, ComponentLink4URL=http://seielect.com/Catalog/SEI-RMCF_RMCP.pdf?src-supplier=Future+Electronics, ComponentLink5Description=http://components.arrow.com/part/dataview/40964023S7542466N1174?src-supplier=Arrow, ComponentLink5URL=http://components.arrow.com/part/dataview/40964023S7542466N1174?src-supplier=Arrow, Composition="Thick Film", Contact Plating=Tin,Matte, Features="Automotive AEC-Q200", Height=0.026inch, Lead Free="Lead Free", Length=0.079inch, Manufacturer Part Number=RMCF0805FT12K0, Mount="Surface Mount", Number of Terminations=2, Packaging="Tape and Reel", Power Rating=125mW, Pricing 1="1=0.1, 10=0.026, 100=0.0104, 1000=0.00466, 2500=0.00405 (USD)", Radiation Hardening=No, Stock 1=30304, Supplier 1=Digi-Key, Width=0.049inch
R4: library part CRCW08050000Z0EA, "VISHAY - CRCW08050000Z0EA - SMD Chip Resistor, Jumper, 0805 [2012 Metric], 0 ohm, CRCW e3 Series, 150 V, Thick Film, 125 mW", Case/Package=0805, Case Code (Metric)=2012, Manufacturer=Vishay, Max Operating Temperature=155°C, Max Power Dissipation=125mW, Min Operating Temperature=-55°C, Package Quantity=1, Resistance=0mR, Supplier Part Number 1=541-0.0ACT-ND, Temperature Coefficient=100ppm/°C, Tolerance=1%, Voltage Rating=150V, Case Code (Imperial)=0805, ComponentLink1Description=http://www.vishay.com/docs/20035/dcrcwe3.pdf?src-supplier=Avnet+Europe, ComponentLink1URL=http://www.vishay.com/docs/20035/dcrcwe3.pdf?src-supplier=Avnet+Europe, ComponentLink2Description=http://www.vishay.com/docs/20035/dcrcwe3.pdf?src-supplier=Distrelec, ComponentLink2URL=http://www.vishay.com/docs/20035/dcrcwe3.pdf?src-supplier=Distrelec, ComponentLink3Description=http://www.vishay.com/docs/20035/dcrcwe3.pdf?src-supplier=Mouser, ComponentLink3URL=http://www.vishay.com/docs/20035/dcrcwe3.pdf?src-supplier=Mouser, ComponentLink4Description=http://uk.rs-online.com/webdocs/0d98/0900766b80d98b26.pdf?src-supplier=RSComponents, ComponentLink4URL=http://uk.rs-online.com/webdocs/0d98/0900766b80d98b26.pdf?src-supplier=RSComponents, ComponentLink5Description=http://www.vishay.com/docs/20035/dcrcwe3.pdf?src-supplier=Future+Electronics, ComponentLink5URL=http://www.vishay.com/docs/20035/dcrcwe3.pdf?src-supplier=Future+Electronics, ComponentLink6Description=http://www.vishay.com/docs/20035/dcrcwe3.pdf?src-supplier=Allied+Electronics, ComponentLink6URL=http://www.vishay.com/docs/20035/dcrcwe3.pdf?src-supplier=Allied+Electronics, ComponentLink7Description=http://www.vishay.com/docs/20035/dcrcwe3.pdf?src-supplier=Digi-Key, ComponentLink7URL=http://www.vishay.com/docs/20035/dcrcwe3.pdf?src-supplier=Digi-Key, ComponentLink8Description=http://www.farnell.com/datasheets/2310790.pdf?src-supplier=Element14, ComponentLink8URL=http://www.farnell.com/datasheets/2310790.pdf?src-supplier=Element14, Composition="Thick Film", Contact Plating=Tin,Lead, Depth=1.25mm, Features="Automotive AEC-Q200", Height=0.45mm, Lead Free="Lead Free", Length=2mm, Manufacturer Part Number=CRCW08050000Z0EA, Military Standard=Not, Number of Terminations=2, Packaging="Tape and Reel", Power Rating=125mW, Pricing 1="1=0.1, 10=0.04, 25=0.0288, 50=0.022, 100=0.0162, 250=0.01236, 500=0.0099, 1000=0.00729 (USD)", Pricing 2="1=0.1, 10=0.024, 100=0.01, 1000=0.007, 5000=0.004, 10000=0.004 (USD)", Radiation Hardening=No, REACH SVHC=Unknown, Stock 1=487981, Stock 2=496700, Supplier 1=Digi-Key, Supplier 2=Mouser, Supplier Part Number 2=71-CRCW0805-0-E3, Termination=SMD/SMT, Voltage Rating (DC)=150V, Weight=0.000194oz, Width=1.25mm
R5 R6 R7: library part CRCW080510K0FKEA, "RES 10.0K OHM 1/8W 1% 0805 SMD", Case/Package=0805, Case Code (Metric)=2012, Manufacturer="Vishay Dale", Max Operating Temperature=155°C, Min Operating Temperature=-55°C, Package Quantity=5000, Power=1/8W, Power Rating=125mW, Resistance=10kR, Supplier Part Number 1=52K9795, Temperature Coefficient=100ppm/°C, Tolerance=1%, Voltage Rating=150V, Case Code (Imperial)=0805, ComponentLink1Description=http://www.mouser.com/ds/2/427/dcrcwe3-109170.pdf?src-supplier=Mouser, ComponentLink1URL=http://www.mouser.com/ds/2/427/dcrcwe3-109170.pdf?src-supplier=Mouser, ComponentLink2Description=http://uk.rs-online.com/webdocs/0d98/0900766b80d98b26.pdf?src-supplier=RSComponents, ComponentLink2URL=http://uk.rs-online.com/webdocs/0d98/0900766b80d98b26.pdf?src-supplier=RSComponents, ComponentLink3Description=http://www.alliedelec.com/m/d/0c934d6939ccefa68dbe0b96d821c8cf.pdf?src-supplier=Allied+Electronics, ComponentLink3URL=http://www.alliedelec.com/m/d/0c934d6939ccefa68dbe0b96d821c8cf.pdf?src-supplier=Allied+Electronics, ComponentLink4Description=http://www.vishay.com/docs/20035/dcrcwe3.pdf?src-supplier=Avnet+Asia, ComponentLink4URL=http://www.vishay.com/docs/20035/dcrcwe3.pdf?src-supplier=Avnet+Asia, ComponentLink5Description=http://www.vishay.com/docs/20035/dcrcwe3.pdf?src-supplier=Avnet+Europe, ComponentLink5URL=http://www.vishay.com/docs/20035/dcrcwe3.pdf?src-supplier=Avnet+Europe, ComponentLink6Description=http://www.farnell.com/datasheets/2310790.pdf?src-supplier=Element14, ComponentLink6URL=http://www.farnell.com/datasheets/2310790.pdf?src-supplier=Element14, ComponentLink7Description=http://www.vishay.com/docs/20035/dcrcwe3.pdf?src-supplier=Avnet, ComponentLink7URL=http://www.vishay.com/docs/20035/dcrcwe3.pdf?src-supplier=Avnet, ComponentLink8Description=http://www.vishay.com/docs/20035/dcrcwe3.pdf?src-supplier=Future+Electronics, ComponentLink8URL=http://www.vishay.com/docs/20035/dcrcwe3.pdf?src-supplier=Future+Electronics, Composition="Thick Film", Contact Plating=Tin, Depth=1.25mm, Height=0.45mm, Lead Free="Lead Free", Length=2mm, Manufacturer Part Number=CRCW080510K0FKEA, Military Standard=Not, Mount Type=SMD, Packaging="Tape and Reel", Pricing 2="1=0.1, 10=0.062, 100=0.025, 1000=0.01, 5000=0.007, 10000=0.006, 25000=0.005 (USD)", Pricing 6="1=0.1, 10=0.062, 100=0.0254, 1000=0.01142, 2500=0.00991 (USD)", Radiation Hardening=No, REACH SVHC=Unknown, Stock 2=101022, Stock 6=1354479, Supplier 1=Newark, Supplier 2=Mouser, Supplier 3=Digi-Key, Supplier 4=Allied, Supplier 5=Farnell, Supplier 6=Digi-Key, Supplier Part Number 2=71-CRCW0805-10K-E3, Supplier Part Number 3=541-10.0KCCT-ND, Supplier Part Number 4=70201192, Supplier Part Number 5=1632457, Supplier Part Number 6=541-10.0KCDKR-ND, Termination=SMD/SMT, Voltage Rating (DC)=150V, Weight=0.000194oz, Width=1.25mm
TP1 TP2 TP3 TP4 TP5 TP6 TP7 TP8 TP9: library part "Test Point PTH", "TEST POINT PAD"
U1: "FTDI - FT4232HL-REEL - USB-UART/MPSSE, 4232, QUAD, 64LQFP", Case/Package=LQFP, Dual Supply Voltage=3.3V, Manufacturer=FTDI, Max Operating Temperature=85°C, Max Supply Voltage=3.63V, Min Operating Temperature=-40°C, Min Supply Voltage=1.62V, Operating Supply Current=70mA, Package Quantity=1000, Supplier Part Number 1=768-1026-1-ND, ComponentLink1Description=http://www.ftdichip.com/Support/Documents/AppNotes/AN_128_User_Guide_For_FT4232H_Factory%20test%20utility.pdf?src-supplier=Digi-Key, ComponentLink1URL=http://www.ftdichip.com/Support/Documents/AppNotes/AN_128_User_Guide_For_FT4232H_Factory%20test%20utility.pdf?src-supplier=Digi-Key, ComponentLink2Description=http://www.alliedelec.com/images/products/datasheets/bm/FTDI/70403916.pdf?src-supplier=Allied+Electronics, ComponentLink2URL=http://www.alliedelec.com/images/products/datasheets/bm/FTDI/70403916.pdf?src-supplier=Allied+Electronics, ComponentLink3Description=http://www.ftdichip.com/Support/Documents/DataSheets/ICs/DS_FT4232H.pdf?src-supplier=Future+Electronics, ComponentLink3URL=http://www.ftdichip.com/Support/Documents/DataSheets/ICs/DS_FT4232H.pdf?src-supplier=Future+Electronics, ComponentLink4Description=https://www.verical.com/server-webapp/html/getDatasheet?partID=643215&src-supplier=Verical, ComponentLink4URL=https://www.verical.com/server-webapp/html/getDatasheet?partID=643215&src-supplier=Verical, ComponentLink5Description=http://datasheet.iiic.cc/ftdi/FT4232HL-REEL.pdf?src-supplier=IIIC, ComponentLink5URL=http://datasheet.iiic.cc/ftdi/FT4232HL-REEL.pdf?src-supplier=IIIC, Data Rate=480Mbps, ESD Protection=Yes, Height=1.4mm, Interface=UART, Lead Free="Lead Free", Length=10.1mm, Manufacturer Part Number=FT4232HL-REEL, Mount="Surface Mount", Number of Channels=1, Number of Pins=64, Number of Transceivers=4, Operating Supply Voltage=3.3V, Packaging="Tape and Reel", Pricing 1="1=8.3, 10=8.09, 50=7.46, 100=7.14, 500=6.88006 (USD)", Pricing 2="1=8.3, 25=8.09, 50=7.46, 100=7.14, 500=6.88, 1000=6.08 (USD)", Radiation Hardening=No, Stock 1=18748, Stock 2=21282, Supplier 1=Digi-Key, Supplier 2=Mouser, Supplier Part Number 2=895-FT4232HL, Weight=0.012088oz, Width=10.1mm
U2: "TEXAS INSTRUMENTS - TPS79333DBVR - IC, V REG, LINEAR, 0.2A, SOT-23-5", Case/Package=SOT-23, Current Rating=200mA, Dropout Voltage=102mV, Input Bias Current=170uA, Manufacturer="Texas Instruments", Max Input Voltage=5.5V, Max Operating Temperature=125°C, Max Output Voltage=3.3V, Max Power Dissipation=560mW, Min Current Limit=285mA, Min Input Voltage=2.7V, Min Operating Temperature=-40°C, Output Voltage Accuracy=2%, Package Quantity=1, Quiescent Current=200uA, Supplier Part Number 1=296-12961-1-ND, Accuracy=2%, ComponentLink1Description=http://www.ti.com/general/docs/lit/getliterature.tsp?genericPartNumber=TPS793&amp;&amp;fileType=pdf&src-supplier=Farnell, ComponentLink1URL=http://www.ti.com/general/docs/lit/getliterature.tsp?genericPartNumber=TPS793&amp;&amp;fileType=pdf&src-supplier=Farnell, ComponentLink2Description=http://www.jameco.com/Jameco/Products/ProdDS/1123416.pdf?src-supplier=Jameco, ComponentLink2URL=http://www.jameco.com/Jameco/Products/ProdDS/1123416.pdf?src-supplier=Jameco, Height=1.15mm, Lead Free="Lead Free", Length=2.9mm, Manufacturer Part Number=TPS79333DBVR, Max Output Current=200mA, Max Supply Voltage=5.5V, Min Output Voltage=3.3V, Min Supply Voltage=2.7V, Nominal Output Voltage=3.3V, Number of Outputs=1, Number of Pins=5, Number of Regulators=1, Output Current=200mA, Output Type=Fixed, Output Voltage=3.3V, Packaging="Tape and Reel", Polarity=Positive, Power Dissipation=560mW, Power Rating=560mW, Pricing 1="1=0.73, 10=0.64, 25=0.6016, 100=0.4559, 250=0.388, 500=0.3686, 1000=0.2813 (USD)", Pricing 2="1=0.72, 10=0.6, 100=0.379, 1000=0.289, 2000=0.282, 3000=0.252, 9000=0.242, 48000=0.233 (USD)", Radiation Hardening=No, REACH SVHC="No SVHC", Stock 1=21565, Stock 2=31707, Supplier 1=Digi-Key, Supplier 2=Mouser, Supplier Part Number 2=595-TPS79333DBVR, Termination=SMD/SMT, Width=1.6mm
XTAL1: library part AA-12.000MAGE-T, "Crystals 12.000MHz 30ppm 12pF -40C to 85C", Case/Package=SMD/SMT, ESR (Equivalent Series Resistance)=100R, Frequency=12MHz, Frequency Stability=50ppm, Frequency Tolerance=30ppm, Manufacturer=TXC, Max Operating Temperature=85°C, Min Operating Temperature=-40°C, Package Quantity=1000, Ratings=AEC-Q200, Supplier Part Number 1=887-1656-1-ND, ComponentLink1Description=http://www.txccrystal.com/images/pdf/number-crystal-automotive.pdf?src-supplier=Digi-Key, ComponentLink1URL=http://www.txccrystal.com/images/pdf/number-crystal-automotive.pdf?src-supplier=Digi-Key, ComponentLink2Description=http://www.farnell.com/datasheets/1811860.pdf?src-supplier=Element14, ComponentLink2URL=http://www.farnell.com/datasheets/1811860.pdf?src-supplier=Element14, Height=0.053inch, Length=0.197inch, Manufacturer Part Number=AA-12.000MAGE-T, Mount="Surface Mount", Number of Pins=2, Packaging="Tape and Reel", Pricing 1="1=0.83, 10=0.734, 50=0.6858, 100=0.6061, 500=0.5742 (USD)", Pricing 2="1=0.83, 10=0.734, 50=0.685, 100=0.606, 500=0.574, 1000=0.435 (USD)", REACH SVHC="No SVHC", Stock 1=2398, Stock 2=4856, Supplier 1=Digi-Key, Supplier 2=Mouser, Supplier Part Number 2=717-AA-12.000MAGE-T, Termination=SMD/SMT, Tolerance=30ppm, Width=3.2mm

## Via types
v1: diameter 0.6, hole 0.3, Top Layer to Bottom Layer, tented both sides, 21 vias
v2: diameter 0.8, hole 0.4, Top Layer to Bottom Layer, tented both sides, 8 vias

## Nets (pads, with @x,y where several pads share a name; then routed paths per layer and width w, separated by ;. In a path a pad name is that pad's centre, name@x,y a point inside that pad or via, vN(x,y) a via of type N, cw(c..) or ccw(c..) an arc to the next point about the centre after c; other vN are vias at no path point)
1.8V: C6.1 C7.1 C21.1 C22.1 C23.1 TP2.1 U1.12 U1.37 U1.49 U1.64 | length 9.9
  Bottom Layer w0.254: C22.1@18.089,11.154 18.114,11.179 U1.37 21.137,11.179 21.526,11.567 ; 28.959,11.567 29.347,11.179 U1.12 32.807,11.179 32.811,11.175
  Bottom Layer w0.508: TP2.1@16.3,19.314 16.307,19.307 18.593,19.307 C6.1@18.6,19.314
3.3V: C3.1 C12.1 C17.1 C18.1 C19.1 C20.1 FB1.1 FB2.1 R5.1 R7.1 TP6.1 U1.20 U1.31 U1.42 U1.50 U1.56 U2.5 | length 18.6
  Bottom Layer w0.254: C20.1@17.8,13.679 U1.42 ; v2@17.8,14.965 17.835,14.965 v2(17.8,15) ; C19.1 22.4,5.605 U1.31 ; U1.50 22.4,20.34 C3.1@22.66,20.6 ; C17.1@24.69,20.575 C17.1@24.79,20.675 ; C17.1@24.925,20.34 25.4,19.865 U1.56 ; C18.1 U1.20
  Bottom Layer w0.508: C20.1@17.8,13.679 v2@17.8,14.965 ; C3.1@22.66,20.6 23.325,20.6 23.596,20.329 23.754,20.329 23.94,20.515 24.654,20.515 24.69,20.551 C17.1@24.69,20.575 ; v2(23.45,5.479) v2@23.489,5.518 ; C17.1@24.79,20.675 24.914,20.675 25.722,21.483 26.722,21.483 R7.1@26.75,21.511 ; C12.1@44.425,5.349 44.606,5.168 46.404,5.168 U2.5
  other v2: 23.675,20.329
5V: C9.1 C10.1 C13.1 FB3.2 U2.1 U2.3 | length 15
  Top Layer w0.508: v2(49.325,2.325) v2(49.325,5.925)
  Bottom Layer w0.508: FB3.2@47.303,9.518 47.514,9.518 47.562,9.566 49.209,9.566 49.35,9.707 50.804,9.707 50.816,9.695 50.816,9.607 50.892,9.607 51.088,9.411 51.088,6.11 50.928,5.95 50.852,5.95 50.822,5.92 49.33,5.92 v2(49.325,5.925) 49.325,5.846 49.171,5.692 49.171,5.168 49.1,5.097 U2.1 ; U2.3 48.875,2.775 v2(49.325,2.325)
GND: C1.2 C2.2 C3.2 C4.2 C5.2 C6.2 C7.2 C8.2 C9.2 C10.2 C11.2 C12.2 C13.2 C14.2 C15.2 C16.2 C17.2 C18.2 C19.2 C20.2 C21.2 C22.2 C23.2 CN1.1 CN2.5 CN3.1 R3.1 R4.2 R6.1 TP9.1 U1.1 U1.5 U1.10 U1.11 U1.13 U1.15 U1.25 U1.35 U1.47 U1.51 U2.2
  other v1: 31.225,11.942 25.573,16.619
NetC8_1: C8.1 CN2.1 FB3.1 | length 8
  Top Layer w0.508: CN2.1@39.65,12.775 41.4,11.025 v2(43.625,11.025)
  Bottom Layer w0.508: v2(43.625,11.025) 43.672,10.978 43.672,9.64 43.793,9.518 FB3.1@45.525,9.518
NetC11_1: C11.1 R5.2 TP5.1 U1.14 | length 20.4
  Bottom Layer w0.254: TP5.1 16.394,8.494 21.691,8.494 23.375,10.179 U1.14 32.671,10.179 33.299,9.551 33.775,9.551 33.775,9.548 34.023,9.3 R5.2@35.575,9.3
NetC14_1: C14.1 U2.4 | length 2.2
  Bottom Layer w0.508: C14.1@44.468,2.797 44.471,2.8 45.853,2.8 46.25,3.197 U2.4
NetC15_1: C15.1 U1.2 XTAL1.1 | length 5.8
  Bottom Layer w0.254: U1.2 31.234,16.188 32.083,16.188 32.602,16.706 32.602,17.138 32.775,17.311 32.875,17.311 34.102,18.538 34.102,19.102 XTAL1.1@34.925,19.925
NetC16_1: C16.1 U1.3 XTAL1.2 | length 9.4
  Bottom Layer w0.254: U1.3 33.09,15.679 34.954,17.543 34.954,17.643 35.749,18.437 37.513,18.437 38.525,19.45 XTAL1.2@38.525,19.925
NetR3_2: R3.2 TP4.1 U1.6 | length 22.4
  Top Layer w0.254: v1(29.9,14.154) 29.979,14.154 34.726,18.9 43.257,18.9 43.609,19.252 43.609,20.034 R3.2@44.443,19.2 ; R3.2 44.357,19.643 TP4.1@46.5,17.5
  Bottom Layer w0.254: v1(29.9,14.154) 29.902,14.156 31.202,14.156 U1.6
NetR6_2: R6.2 U1.63 | length 3.8
  Bottom Layer w0.254: U1.63 28.9,21.359 29.059,21.518 R6.2@29.775,21.518
NetR7_2: R7.2 U1.61 | length 6.1
  Bottom Layer w0.254: R7.2@26.75,23.797 27.296,23.797 27.902,23.191 27.902,18.506 U1.61
NetTP7_1: TP7.1 U1.60 | length 28.1
  Top Layer w0.254: v1(26.688,20.091) 29.697,23.1 v1(32.3,23.1)
  Bottom Layer w0.254: v1(26.688,20.091) 27.377,19.402 27.377,18.527 U1.60 ; v1(32.3,23.1) 45.8,23.1 49.7,19.2 49.7,19 TP7.1@49.7,18.9
NetTP8_1: TP8.1 U1.36 | length 7.3
  Bottom Layer w0.254: TP8.1 14.3,10.1 18.448,10.1 19.026,10.679 U1.36
RX1: CN1.4 U1.17 | length 45.5
  Top Layer w0.254: v1(30.25,7.554) 56.6,7.554 v1(68.464,19.418)
  Bottom Layer w0.254: U1.17 30.2,7.354 30.25,7.404 v1(30.25,7.554) ; CN1.4 68.464,20.736 v1(68.464,19.418)
RX2: CN1.2 U1.27 | length 49.2
  Top Layer w0.254: v1(24.425,9.498) 56.058,9.498 v1(65.978,19.418)
  Bottom Layer w0.254: U1.27 24.391,7.363 24.391,8.347 24.295,8.443 24.295,9.313 24.425,9.442 v1(24.425,9.498) ; CN1.2 65.978,20.722 v1(65.978,19.418)
RX3: CN3.4 U1.39 | length 52.6
  Top Layer w0.254: v1(16.225,12.779) 16.225,15.392 25.783,24.95 53.349,24.95 v1(54.925,23.374)
  Bottom Layer w0.254: v1(16.225,12.779) 18.625,12.779 19.202,12.202 20.052,12.202 U1.39 ; CN3.4 v1(54.925,23.374)
RX4: CN3.2 U1.52 | length 33.5
  Top Layer w0.254: v1(24.075,16.929) 26.556,19.41 32.81,19.41 35.371,21.971 v1(52.432,21.971)
  Bottom Layer w0.254: U1.52 23.409,18.495 23.409,17.595 v1(24.075,16.929) ; CN3.2 52.432,20.757 v1(52.432,21.971)
TX1: CN1.5 U1.16 | length 47.4
  Top Layer w0.254: v1(31.2,6.829) 57.115,6.829 v1(69.704,19.418)
  Bottom Layer w0.254: v1(31.2,6.829) 31.2,9.154 U1.16 ; CN1.5 69.704,20.746 v1(69.704,19.418)
TX2: CN1.3 U1.26 | length 49.4
  Top Layer w0.254: v1(24.976,8.725) 56.49,8.725 v1(67.221,19.456)
  Bottom Layer w0.254: U1.26 24.904,7.358 24.904,8.56 24.976,8.632 v1(24.976,8.725) ; CN1.3 67.221,20.729 v1(67.221,19.456)
TX3: CN3.5 U1.38 | length 57.1
  Top Layer w0.254: v1(15.225,12.266) 15.225,15.475 25.375,25.625 54.524,25.625 v1(56.175,23.974)
  Bottom Layer w0.254: v1(15.225,12.266) 15.412,12.079 18.607,12.079 18.992,11.694 19.842,11.694 U1.38@19.849,11.687 ; CN3.5 v1(56.175,23.974)
TX4: CN3.3 U1.48 | length 42.5
  Top Layer w0.254: v1(18.475,16.679) 26.153,24.357 51.809,24.357 v1(53.675,22.491)
  Bottom Layer w0.254: v1(18.475,16.679) U1.48 ; CN3.3 v1(53.675,22.491)
USB_RX_N: R1.2 U1.7 | length 2.2
  Bottom Layer w0.254: U1.7 32.736,13.679 R1.2
USB_RX_P: R2.2 U1.8 | length 2.2
  Bottom Layer w0.254: U1.8@31.225,13.171 32.736,13.171 R2.2
USB_SHIELD: CN2.0 R4.1 | length 3
  Top Layer w0.254: CN2.0@45.45,13.675 CN2.0@45.468,13.693
  Top Layer w0.508: CN2.0@45.468,13.693 45.624,13.538 48.062,13.538 R4.1@48.3,13.3
USB_TX_N: CN2.2 R1.1 | length 6.3
  Bottom Layer w0.381: R1.1 35.01,14.225 36.231,15.446 39.629,15.446 CN2.2
USB_TX_P: CN2.3 R2.1 | length 7.2
  Bottom Layer w0.381: R2.1 35.01,12.625 35.931,11.704 40.366,11.704 41.25,12.589 CN2.3
VPHY: C4.1 C5.1 FB2.2 TP3.1 U1.4 | length 20.3
  Top Layer w0.508: FB2.2 C5.1 26.585,14.971 28.448,14.971 28.6,15.123 29.844,15.123 29.956,15.235 30.342,15.235 35.307,20.2 41.375,20.2 TP3.1@41.4,20.175
  Bottom Layer w0.254: v2(29.9,15.179) 31.007,15.179 31.015,15.171 U1.4@31.225,15.171
VPLL: C1.1 C2.1 FB1.2 TP1.1 U1.9 | length 20.3
  Top Layer w0.508: FB1.2 C2.1 26.579,13.06 28.496,13.06 28.688,12.868 29.635,12.868 29.821,12.682 v2(29.9,12.682) 29.956,12.737 30.877,12.737 35.665,17.525 TP1.1@41.4,17.525
  Bottom Layer w0.254: v2(29.9,12.682) 29.9,12.679 U1.9
pads on no net: CN1.0 CN2.4 CN3.0 FD1. FD2. FD3. M1.0 M2.0 M3.0 M4.0 U1.18 U1.19 U1.21 U1.22 U1.23 U1.24 U1.28 U1.29 U1.30 U1.32 U1.33 U1.34 U1.40 U1.41 U1.43 U1.44 U1.45 U1.46 U1.53 U1.54 U1.55 U1.57 U1.58 U1.59 U1.62

## Polygon pours and split planes (outlines as drawn)
GND on Bottom Layer "Bottom_Layer-GND" (solid, remove dead copper, pour order 26): 0,25 cw(c3,25) 3,28 79.452,28 cw(c79.452,24.952) 82.5,24.952 82.5,3.048 cw(c79.452,3.048) 79.452,0 3.048,0 cw(c3.048,3.048) 0,3.048
1.8V on Bottom Layer "1.8V_Bottom" (solid, pour order 24): 22.05,17.475 22.4,17.125 22.396,12.321 22.642,12.075 28,12.075 28.275,12.35 28.275,16.775 29.25,17.75 29.25,19.458 31.775,19.458 31.775,18.575 29.31,16.11 29.31,12.266 29.313,11.071 21.203,11.068 21.2,16.827 20.722,17.305 19.149,17.305 17.825,18.629 17.825,20.104 19.225,20.104 19.8,19.528 22.05,19.518